# Altium PCB mdm3.PcbDoc (part 1 of 3)
Units mil, origin at the board's own origin, x right, y up, seen from the top; angles counter-clockwise.
Board outline 3925 x 3925 mil, 2 copper layers (TopLayer, BottomLayer); 80 components, 90 nets, 713 pads, 10 vias.
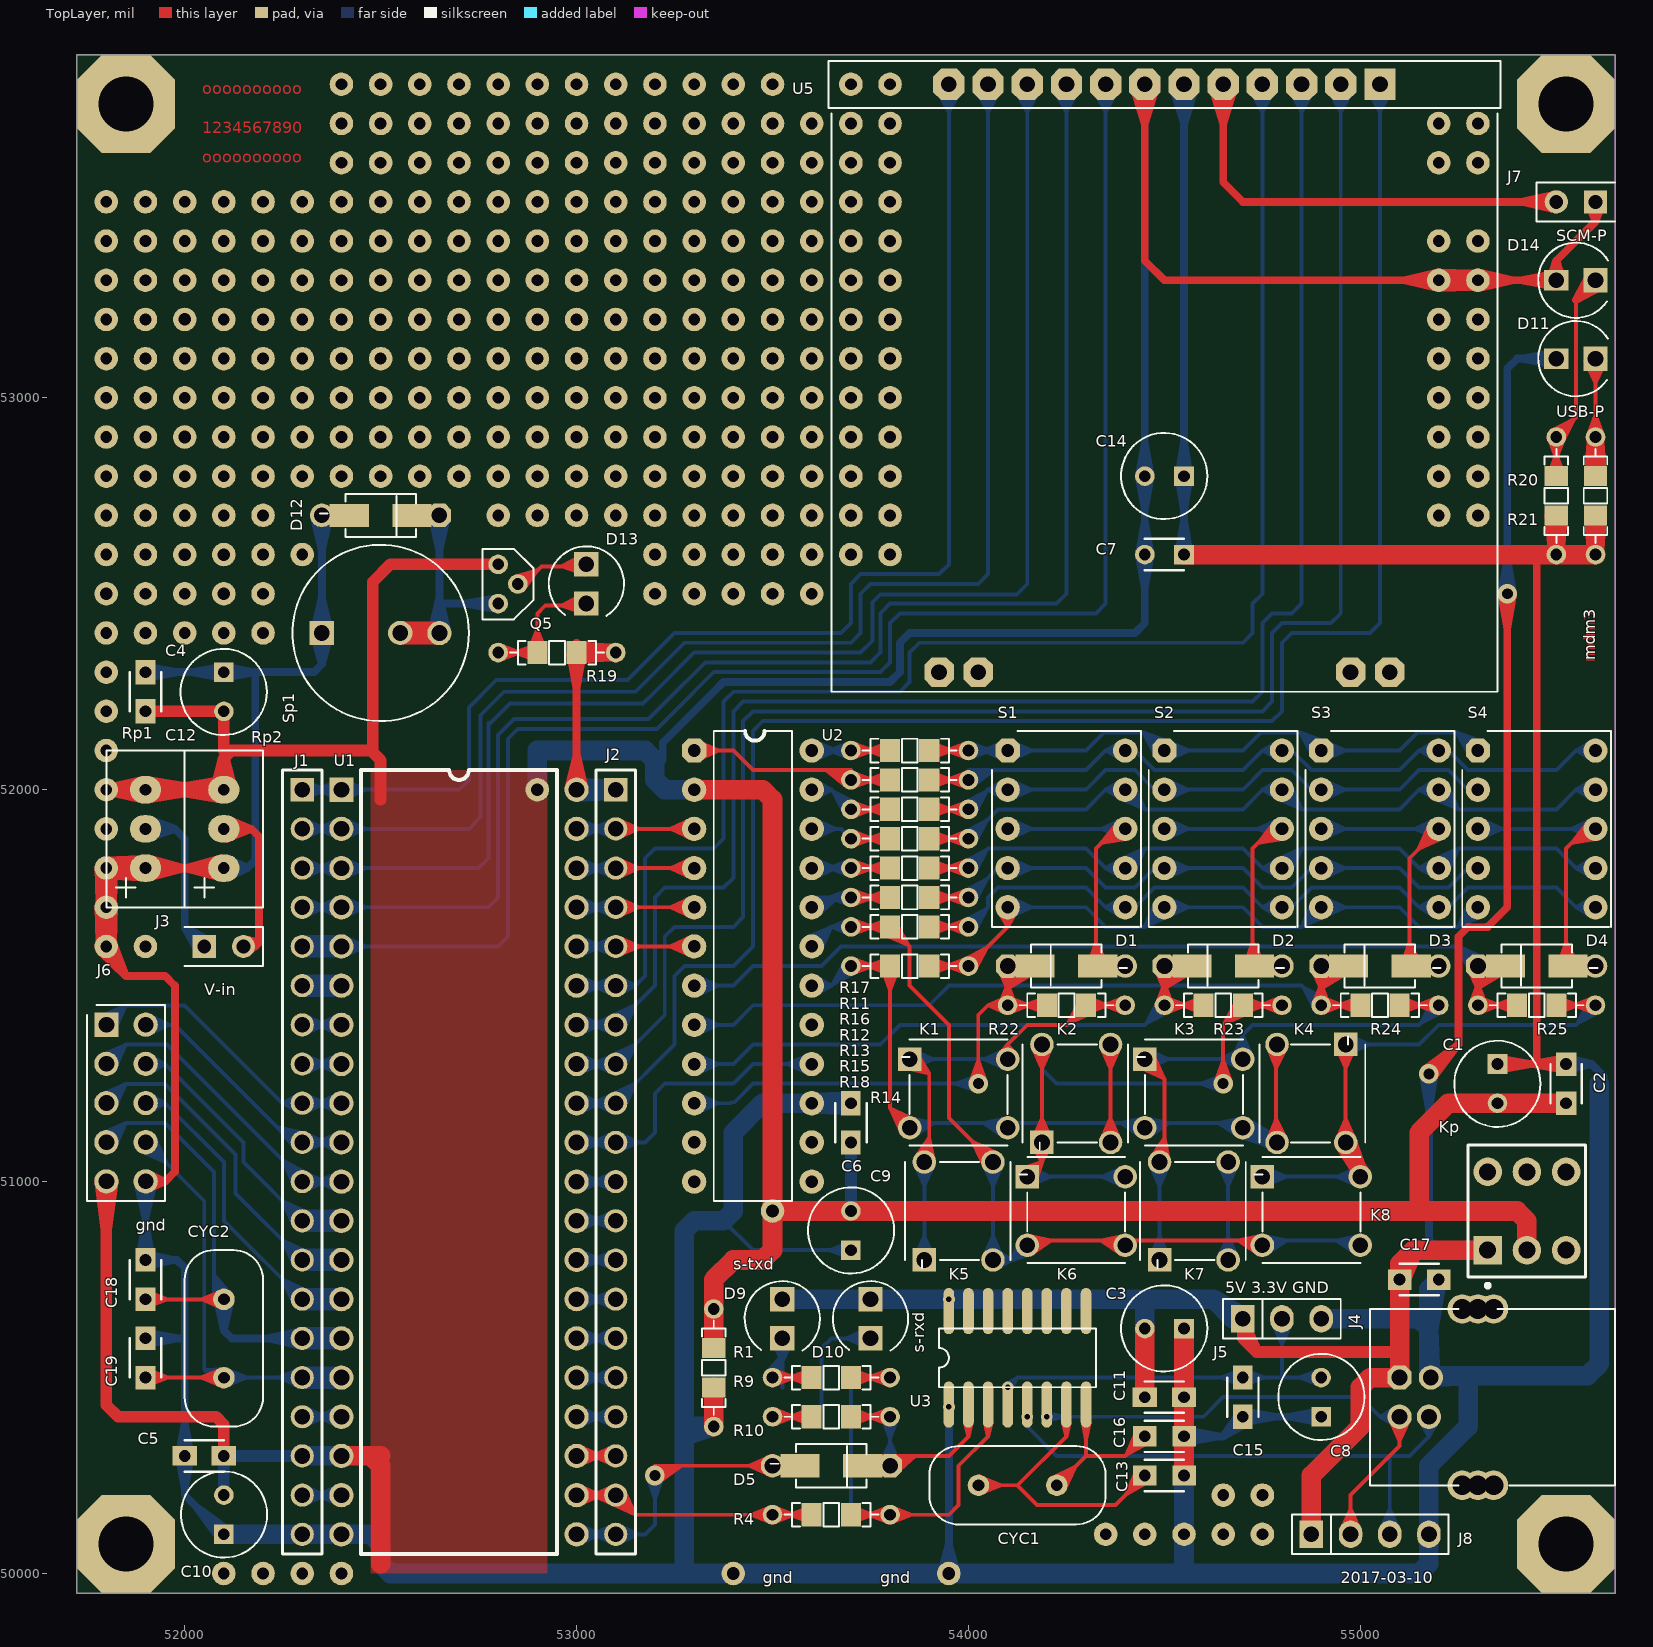
[diagram p0: TopLayer view]
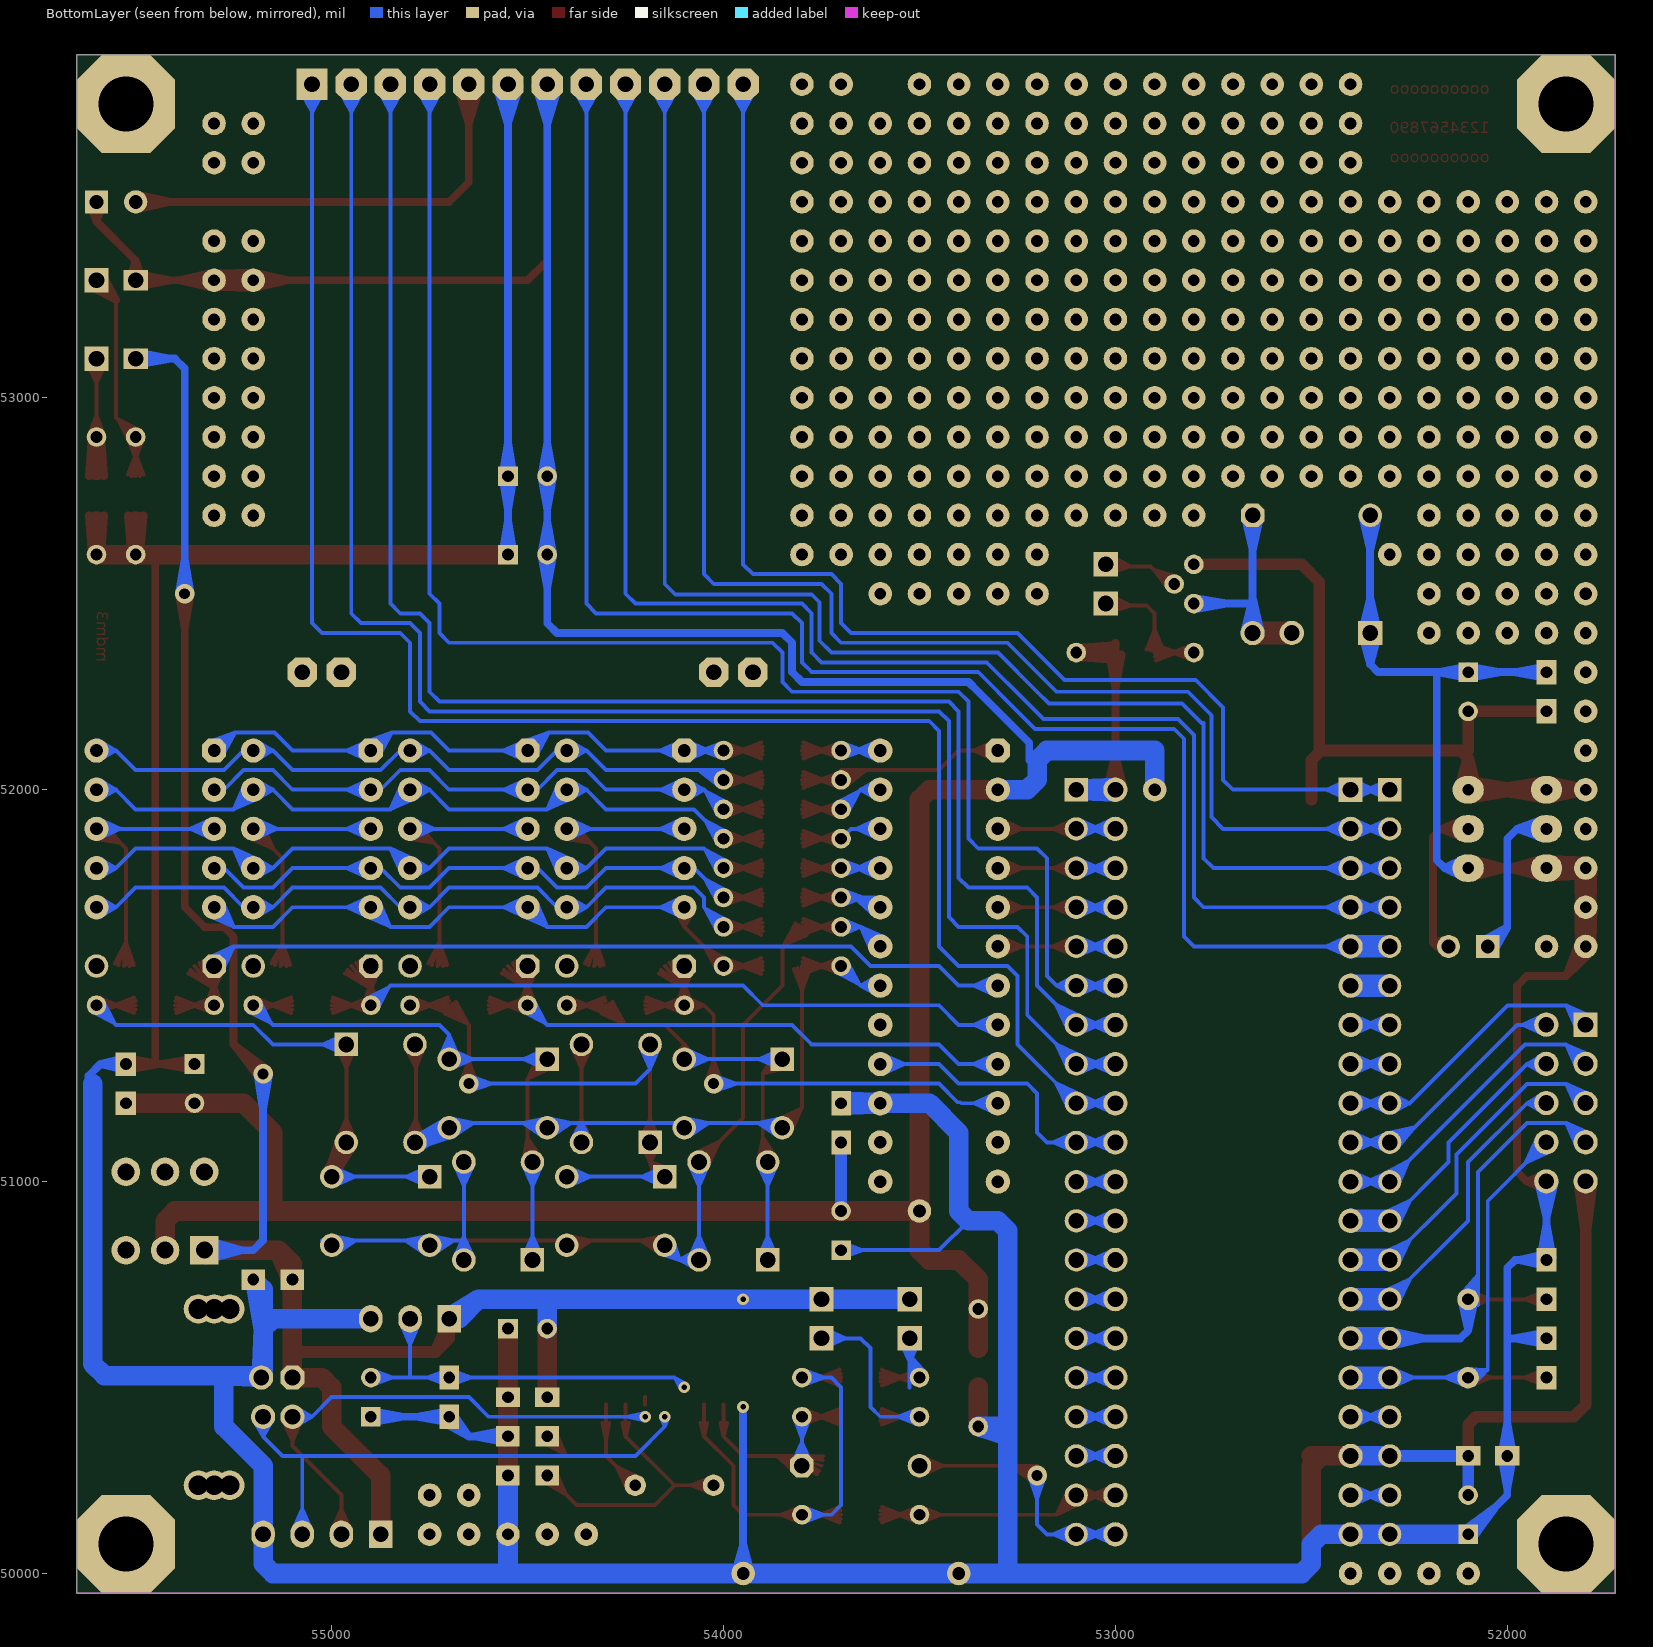
[diagram p1: BottomLayer view, seen from below]

## Layer stack, top to bottom
TopLayer: signal copper 1.4
Dielectric: core 12.6, FR-4, Dk 4.8
BottomLayer: signal copper 1.4

## Board outline
51725,53875 51725,49950 55650,49950 55650,53875

## Design rules (kind name [scope] priority, off if disabled: settings)
AssemblyTestPointUsage [All] p1 off:
AssemblyTestpoint [All] p1 off: testpointundercomponent=TRUE minsize=40 maxsize=100 preferedsize=60 minholesize=0 maxholesize=40 preferedholesize=32 testpointgrid=1 usegrid=TRUE gridtolerance=0.01 allowsidetop=TRUE allowsidebottom=TRUE
Clearance [All] p1: gap=10
ComponentClearance [All] p1 off: gap=10 collisioncheckmode=3 verticalgap=10 showdistances=FALSE
DiffPairsRouting [All] p1 off: maxlimit=10 minlimit=10 mostfreqgap=10 maxuncoupledlength=500
FabricationTestPointUsage TestPointUsage [All] p1 off: valid=0 allowmultiple=FALSE
FabricationTestpoint Testpoint [All] p1 off: side=3 testpointundercomponent=TRUE minsize=40 maxsize=100 preferedsize=60 minholesize=20 maxholesize=40 preferedholesize=32 testpointgrid=1 allowsidetop=TRUE allowsidebottom=TRUE usegrid=TRUE gridtolerance=0.01
FanoutControl Fanout_BGA [IsBGA] p1 off: bgadir=Out bgaviamode=Centered fanoutstyle=Auto fanoutdirection=Alternating viagrid=1 // Fanout_BGA (Default Rule)
FanoutControl Fanout_LCC [IsLCC] p2 off: bgadir=Out bgaviamode=Centered fanoutstyle=Auto fanoutdirection=Alternating viagrid=1 // Fanout_LCC (Default Rule)
FanoutControl Fanout_SOIC [IsSOIC] p3 off: bgadir=Out bgaviamode=Centered fanoutstyle=Auto fanoutdirection=Alternating viagrid=1 // Fanout_SOIC (Default Rule)
FanoutControl Fanout_Small [(CompPinCount < 5)] p4 off: bgadir=Out bgaviamode=Centered fanoutstyle=Auto fanoutdirection=OutThenIn viagrid=1 // Fanout_Small (Default Rule)
FanoutControl Fanout_Default [All] p5 off: bgadir=Out bgaviamode=Centered fanoutstyle=Auto fanoutdirection=Alternating viagrid=1 // Fanout_Default (Default Rule)
Height [All] p1 off: minheight=0 maxheight=1000 prefheight=500
HoleToHoleClearance [All] p1 off: gap=10 allowstackedmicrovias=TRUE
LayerPairs [All] p1 off: enforce=TRUE
MinimumSolderMaskSliver [All] p1 off: minsoldermaskwidth=10
NetAntennae [All] p1 off: netantennaetolerance=0
PasteMaskExpansion [All] p1 off: expansion=0
PlaneClearance [All] p1 off: clearance=20
PlaneConnect [All] p1 off: planeconnectstyle=Relief reliefexpansion=20 reliefentries=4 reliefconductorwidth=10 reliefairgap=10
PolygonConnect [All] p1 off: connectstyle=Relief reliefconductorwidth=10 reliefentries=4 polygonreliefangle="90 Angle"
RoutingPriority [All] p1 off: routingpriority=0
RoutingVias [All] p1: holewidth=28 width=50 viastyle="Through Hole" minholewidth=28 minwidth=50 maxholewidth=28 maxwidth=50
SilkToSilkClearance [All] p1 off: silktosilkclearance=10
SilkscreenOverComponentPads [All] p1 off: minsilkscreentomaskgap=10
SolderMaskExpansion [All] p1 off: expansion=4
Width [All] p1: maxlimit=100 minlimit=10 preferedwidth=30 toplayer_prefwidth=10
Width Width_1 [All] p2 off: maxlimit=100 minlimit=10 preferedwidth=50
Width Width_2 [All] p3 off: maxlimit=100 minlimit=10 preferedwidth=30
6 further rules are at their usual default settings.

## Components (designator, comment, footprint, x,y, rotation, side; value= is the part's Value field where it differs from the comment)
C1 "10u/16v" rb.1/.2 55350,51250 r90 top
C2 "104" cap0.1#1 55525,51200 r90 top
C3 "10u/16v" rb.1/.2 54500,50625 r0 top
C4 "104" cap0.1#2 51900,52200 r90 top
C5 "104" cap0.1#2 52100,50300 r180 top
C6 "104" cap0.1#2 53700,51100 r90 top
C7 "104" cap0.1#3 54450,52600 r0 top
C8 "10u/16v" rb.1/.2 54900,50450 r270 top
C9 "100u/16v" rb.1/.2 53700,50875 r270 top
C10 "10u/16v" rb.1/.2 52100,50150 r270 top
C11 "104" cap0.1#2 54450,50450 r0 top
C12 "10u/16v" rb.1/.2 52100,52250 r90 top
C13 "104" cap010805 54450,50250 r0 top
C14 "10u/16v" rb.1/.2 54500,52800 r0 top
C15 "104" cap0.1#2 54700,50500 r270 top
C16 "" cap010805 54450,50350 r0 top
C17 "104" cap0.1#1 55100,50750 r0 top
C18 "" cap010805 51900,50700 r90 top
C19 "" cap010805 51900,50500 r90 top
CYC1 "12Mhz" cyc-rad 54225,50225.07 r180 top
CYC2 "22.1184Mhz" cyc-rad 52100,50500 r90 top
D1 "4007" smc03 54100,51550 r0 top
D2 "4007" smc03 54500,51550 r0 top
D3 "4007" smc03 54900,51550 r0 top
D4 "4007" smc03 55300,51550 r0 top
D5 "sma03" smc03 53800,50275 r180 top
D9 "LED" led-3#1 53525,50650 r270 top
D10 "LED" led-3#1 53750,50650 r270 top
D11 "LED" led-3#2 55550,53100 r0 top
D12 "4007" smc03 52650,52700 r180 top
D13 "LED" led-3#1 53025,52525 r270 top
D14 "LED" led-3#2 55550,53300 r0 top
J1 "Header 20" HDR1X20 52300,52000 r270 top
J2 "Header 20" HDR1X20 53100,52000 r270 top
J3 "Header 2" HDR1X2 52050,51600 r0 top
J4 "" USB_b 55100,50500 r90 top
J5 "CON3" SIP3 54800,50650 r0 top
J6 "CON10" idc10 51800,51400 r270 top
J7 "Header 2" HDR1X2 55600,53500 r180 top
J8 "CON4" SIP4 54975,50100 r0 top
K1 "6-6-5" pb6_6 53975,51225 r0 top
K2 "6-6-5" pb6_6 54275,51225 r90 top
K3 "6-6-5" pb6_6 54575,51225 r0 top
K4 "6-6-5" pb6_6 54875,51225 r270 top
K5 "6-6-5" pb6_6 53975,50925 r90 top
K6 "6-6-5" pb6_6 54275,50925 r0 top
K7 "6-6-5" pb6_6 54575,50925 r90 top
K8 "6-6-5" pb6_6 54875,50925 r0 top
Kp "SW-DPDT" DPDT-6 55425,50925 r90 top
Q5 "8550" to-92a 52800,52575 r270 top
R1 "Res2" a030805 53350,50675 r270 top
R4 "Res2" a030805 53800,50150 r180 top
R9 "Res2" a030805 53500,50500 r0 top
R10 "Res2" a030805 53800,50400 r180 top
R11 "Res2" a030805 53700,52025 r0 top
R12 "Res2" a030805 53700,51875 r0 top
R13 "Res2" a030805 53700,51800 r0 top
R14 "Res2" a030805 53700,51550 r0 top
R15 "Res2" a030805 53700,51725 r0 top
R16 "Res2" a030805 53700,51950 r0 top
R17 "Res2" a030805 53700,52100 r0 top
R18 "Res2" a030805 53700,51650 r0 top
R19 "Res2" a030805 52800,52350 r0 top
R20 "Res2" a030805 55500,52600 r90 top
R21 "Res2" a030805 55600,52600 r90 top
R22 "Res2" a030805 54100,51450 r0 top
R23 "Res2" a030805 54500,51450 r0 top
R24 "Res2" a030805 54900,51450 r0 top
R25 "Res2" a030805 55300,51450 r0 top
Rp1 "10k" VR3296-1 51900,51900 r270 top
Rp2 "10k" VR3296-1 52100,51900 r270 top (schematic designator Rp1)
S1 "3911AH" LED10s 54100,52100 r0 top
S2 "3911AH" LED10s 54500,52100 r0 top
S3 "3911AH" LED10s 54900,52100 r0 top
S4 "3911AH" LED10s 55300,52100 r0 top
Sp1 "SPEAKER" sp0.23 52350,52400 r0 top
U1 "IAP15F2K61S2" DIP40 52400,52000 r0 top
U2 "CH451" dip24 53300,52100 r0 top
U3 "CH340G" SOP-16 53925,50550 r0 top
U5 "lcd" jlx12864-1 55050,53800 r0 top locked

## Footprints (in the part's own frame and the unit in brackets; to place one, negate y for a bottom-side part, rotate by r counter-clockwise, add the part's x,y. Pads: shape width x height; smd on the part's side, far side on the other; paste and mask are expansions set on the pad)
a030805 [mm]
  round 1.27 hole 0.762: 1(0,0) 2(7.62,0)
  rect 1.3x1.5 smd: 3(2.54,0) 4(5.08,0)
  silkscreen extent 0.76,-0.76 6.86,0.76
cap0.1#1 [mil]
  rect 60x52 hole 30: 1(0,0) 2(100,0)
  silkscreen extent 0,-40 100,40
cap0.1#2 [mil]
  rect 62x50 hole 30: 1(0,0) 2(100,0)
  silkscreen extent 0,-40 100,40
cap0.1#3 [mil]
  round 50 hole 30: 1(0,0)
  rect 50x50 hole 30: 2(100,0)
  silkscreen extent 0,-40 100,40
cap010805 [mil] "0.1&0805"
  rect 60x52 hole 30: 1(0,0) 2(100,0)
  silkscreen extent 0,-40 100,40
cyc-rad [mil]
  round 55 hole 30: 1(-0.45,-0.07) 2(199.55,-0.07)
  silkscreen extent -125,-100 325,100
dip24 [mil]
  oct 62x62 hole 32: 1(0,0)
  round 62 hole 32: 2(0,-100) 3(0,-200) 4(0,-300) 5(0,-400) 6(0,-500) 7(0,-600) 8(0,-700) 9(0,-800) 10(0,-900) 11(0,-1000) 12(0,-1100) 13(300,-1100) 14(300,-1000) 15(300,-900) 16(300,-800) 17(300,-700) 18(300,-600) 19(300,-500) 20(300,-400) 21(300,-300) 22(300,-200) 23(300,-100) 24(300,0)
  silkscreen extent 50,-1150 250,50
DIP40 [mil]
  rect 62x62 hole 40: 1(0,0)
  round 62 hole 40: 2(0,-100) 3(0,-200) 4(0,-300) 5(0,-400) 6(0,-500) 7(0,-600) 8(0,-700) 9(0,-800) 10(0,-900) 11(0,-1000) 12(0,-1100) 13(0,-1200) 14(0,-1300) 15(0,-1400) 16(0,-1500) 17(0,-1600) 18(0,-1700) 19(0,-1800) 20(0,-1900) 21(600,-1900) 22(600,-1800) 23(600,-1700) 24(600,-1600) 25(600,-1500) 26(600,-1400) 27(600,-1300) 28(600,-1200) 29(600,-1100) 30(600,-1000) 31(600,-900) 32(600,-800) 33(600,-700) 34(600,-600) 35(600,-500) 36(600,-400) 37(600,-300) 38(600,-200) 39(600,-100) 40(600,0)
  silkscreen extent 50,-1950 550,50
DPDT-6 [mm] "Double-Pole, Double-Throw Switch; 6 Leads"
  rect 1.85x1.85 hole 1.1: 1(-2.54,2.54)
  round 1.85 hole 1.1: 2(-2.54,0) 3(-2.54,-2.54) 4(2.54,-2.54) 5(2.54,0) 6(2.54,2.54)
  silkscreen extent -4.96,-3.81 4.28,3.81
HDR1X2 [mm] "Connector; Header; 2 Position"
  rect 1.5x1.5 hole 0.9: 1(0,0)
  round 1.5 hole 0.9: 2(2.54,0)
  silkscreen extent -1.27,-1.27 3.81,1.27
HDR1X20 [mm] "Connector; Header; 20 Position"
  rect 1.5x1.5 hole 1.016: 1(0,0)
  round 1.5 hole 1.016: 2(2.54,0) 3(5.08,0) 4(7.62,0) 5(10.16,0) 6(12.7,0) 7(15.24,0) 8(17.78,0) 9(20.32,0) 10(22.86,0) 11(25.4,0) 12(27.94,0) 13(30.48,0) 14(33.02,0) 15(35.56,0) 16(38.1,0) 17(40.64,0) 18(43.18,0) 19(45.72,0) 20(48.26,0)
  silkscreen extent -1.27,-1.27 49.53,1.27
idc10 [mil]
  rect 62x62 hole 40: 1(-0.5,0.29)
  round 62 hole 40: 2(-0.5,100.29) 3(99.5,0.29) 4(99.5,100.29) 5(199.5,0.29) 6(199.5,100.29) 7(299.5,0.29) 8(299.5,100.29) 9(399.5,0.29) 10(399.5,100.29)
  silkscreen extent -51,-50 450,150
jlx12864-1 [mil]
  rect 80x80 hole 40: 1(0,0)
  oct 80x80 hole 40: 2(-100,0) 3(-200,0) 4(-300,0) 5(-400,0) 6(-500,0) 7(-600,0) 8(-700,0) 9(-800,0) 10(-900,0) 11(-1000,0) 12(-1100,0)
  silkscreen extent -1407,-60 308,60
LED10s [mil]
  oct 62x62 hole 32: 1(0,0)
  round 62 hole 32: 2(0,-100) 3(0,-200) 4(0,-300) 5(0,-400) 6(300,-400) 7(300,-300) 8(300,-200) 9(300,-100) 10(300,0)
  silkscreen extent -40,-450 340,50
led-3#1 [mil]
  rect 62x62 hole 40: 1(-50,0) 2(50,0)
  silkscreen extent -96,-96 81,96
led-3#2 [mil]
  rect 62x52 hole 40: 1(-50,0)
  rect 62x62 hole 40: 2(50,0)
  silkscreen extent -96,-96 81,96
pb6_6 [mil] "button"
  rect 60x60 hole 40: 1(-125,87.5)
  round 60 hole 40: 2(-125,-87.5) 3(125,-87.5) 4(125,87.5)
  silkscreen extent -145,-132 125,138
rb.1/.2 [mil]
  rect 50x50 hole 30: 1(50,0)
  round 50 hole 30: 2(-50,0)
  silkscreen extent -110,-110 109,110
SIP3 [mil]
  rect 60x70 hole 40: 1(-100,0)
  oval 60x70 hole 40: 2(0,0) 3(100,0)
  silkscreen extent -150,-50 150,50
SIP4 [mil]
  rect 60x70 hole 40: 1(-100,0)
  oval 60x70 hole 40: 2(0,0) 3(100,0) 4(200,0)
  silkscreen extent -150,-50 250,50
smc03 [mil]
  oct 60x60 hole 40: 1(0,0)
  round 60 hole 40: 2(300,0)
  rect 100x59.06 smd: 3(70,0) 4(230,0)
  silkscreen extent 60,-55 305,55
SOP-16 [mil] "Small Outline; 16 Leads; Body Width 5.6 mm; Pitch 1.27 mm"
  oval 27x118 smd: 1(25,-119) 2(75,-119) 3(125,-119) 4(175,-119) 5(225,-119) 6(275,-119) 7(325,-119) 8(375,-119) 9(375,119.5) 10(325,119.5) 11(275,119.5) 12(225,119.5) 13(175,119.5) 14(125,119.5) 15(75,119.5) 16(25,119.5)
  silkscreen extent 0,-75 400,75
sp0.23 [mil] "speak sip2-sip3"
  rect 62x62 hole 40: 1(0.09,-0.33)
  round 62 hole 40: 2(200,0) 3(300.09,-0.33)
  silkscreen extent -75,-225 375,225
to-92a [mil]
  round 50 hole 30: 1(0,0) 2(50,50) 3(100,0)
  silkscreen extent -39,-40 141,90
USB_b [mil]
  oct 62x62 hole 40: 1(0,0)
  round 62 hole 40: 2(-100,0) 3(-100,-75) 4(0,-80)
  round 75 hole 50: 5(-275,-240) 5(-275,-200) 5(-275,-160) 6(175,-200) 6(175,-160) 6(175,-240)
  silkscreen extent -275,-550 175,75
VR3296-1 [mil]
  oval 70x80 hole 30: 1(-100,0) 2(0,0) 3(100,0)
  silkscreen extent -200,-100 200,100

## Part data
C1 C3 C8 C9 C10 C12 C14: library part ELECTRO1, "Electrolytic Capacitor"
C2 C4 C5 C6 C7 C11 C15 C17: library part CAP, "Capacitor"
C13 C16 C18 C19: library part CAP
CYC1 CYC2: library part CRYSTAL, "Crystal"
D1 D2 D3 D4 D12: library part DIODE, "Diode"
J1 J2: "Header, 20-Pin"
J3 J7: "Header, 2-Pin"
J4: library part CON4, "Connector"
J5 J6 J8: "Connector"
K1 K2 K3 K4 K5 K6 K7 K8: library part SW-PB2
Kp: "Double-Pole, Double-Throw Switch"
Q5: library part PNP
R1 R4: library part Res22, "Resistor"
R9 R10 R11 R12 R13 R14 R15 R16 R17 R18 R19 R20 R21 R22 R23 R24 R25: "Resistor"
Rp1 Rp2: library part POT2
S1 S2 S3 S4: library part DS1
Sp1: "SPEAKER sip0.2/0.3"
U1: library part Component_3
U5: library part "12 HEADER"

## Free pads (board coordinates)
  round 60 hole 30: 0(51800,51600) 0(51800,52000) 0(54550,50100) 1(51800,51700) 1(52200,52400) 1(54450,50100) 2(51800,51800) 2(52000,52700) 2(52000,52800) 2(52000,53000) 2(52000,53100) 2(52100,52400) 2(53300,52500) 2(54350,50100) 3(52000,52400) 3(53300,52600) 3(54650,50100) 4(52300,52600) 4(53400,52600) 4(54750,50100) 5(51800,52100) 5(51800,52400) 5(52100,50000) 5(53400,52500) 5(54750,50200) 6(51900,51600) 6(51900,52400) 6(52200,50000) 6(52200,52500) 6(53500,52500) 6(54650,50200) 7(51800,52300) 7(52300,50000) 7(53500,52600) 8(51800,52200) 8(52400,50000) 8(53600,52600) 9(52800,52700) 9(53600,52500) 10(52900,52700) 10(53700,52600) 11(53000,52700) 11(53800,52600) 12(52200,52700) 12(53100,52700) 13(52100,52700) 13(53100,52800) 14(53200,52800) 15(53200,52700) 16(53200,52600) 17(53200,52500) 18(51800,51900) 18(51800,53200) 18(51800,53300) 18(51800,53400) 18(51800,53500) 19(51900,53200) 19(51900,53300) 19(51900,53400) 19(51900,53500) 19(52500,53800) 19(53300,52700) 20(52000,53300) 20(52000,53400) 20(52000,53500) 20(52100,52800) 20(52100,52900) 20(52100,53000) 20(52100,53100) 20(52100,53200) 20(52100,53300) 20(52500,53700) 20(52600,53800) 20(53400,52700) 20(55200,52700) 21(52100,53400) 21(52100,53500) 21(52200,52800) 21(52200,52900) 21(52200,53000) 21(52200,53100) 21(52200,53200) 21(52200,53300) 21(52500,53600) 21(52600,53600) 21(53500,52700) 21(53700,52700) 21(55300,52700) 22(52200,53400) 22(52200,53500) 22(52300,52800) 22(52300,52900) 22(52300,53000) 22(52300,53100) 22(52300,53200) 22(52300,53300) 22(52400,53600) 22(52600,53700) 22(53600,52700) 22(53800,52700) 23(52300,53400) 23(52300,53500) 23(52400,52800) 23(52400,52900) 23(52400,53000) 23(52400,53100) 23(52400,53200) 23(52400,53300) 23(52400,53700) 23(53700,53800) 24(52400,53400) 24(52400,53500) 24(52400,53800) 24(52500,52800) 24(52500,52900) 24(52500,53000) 24(52500,53100) 24(52500,53200) 24(52500,53300) 24(53800,53800) 25(52500,53400) 25(52500,53500) 25(52600,52800) 25(52600,52900) 25(52600,53000) 25(52600,53100) 25(52600,53200) 25(52600,53300) 26(52600,53400) 26(52600,53500) 26(52700,52800) 26(52700,52900) 26(52700,53000) 26(52700,53100) 26(52700,53200) 26(52700,53300) 26(52700,53700) 26(52700,53800) 27(52700,53400) 27(52700,53500) 27(52700,53600) 27(52800,52800) 27(52800,52900) 27(52800,53000) 27(52800,53100) 27(52800,53200) 27(52800,53300) 27(52800,53700) 27(52800,53800) 28(52800,53400) 28(52800,53500) 28(52800,53600) 28(52900,52800) 28(52900,52900) 28(52900,53000) 28(52900,53100) 28(52900,53200) 28(52900,53300) 28(52900,53700) 28(52900,53800) 29(52900,53400) 29(52900,53500) 29(52900,53600) 29(53000,52800) 29(53000,52900) 29(53000,53000) 29(53000,53100) 29(53000,53200) 29(53000,53300) 29(53000,53700) 29(53000,53800) 30(53000,53400) 30(53000,53500) 30(53000,53600) 30(53100,52900) 30(53100,53000) 30(53100,53100) 30(53100,53200) 30(53100,53300) 30(53100,53700) 30(53100,53800) 31(53100,53400) 31(53100,53500) 31(53100,53600) 31(53200,52900) 31(53200,53000) 31(53200,53100) 31(53200,53200) 31(53200,53300) 31(53200,53700) 31(53200,53800) 32(53200,53400) 32(53200,53500) 32(53200,53600) 32(53300,52800) 32(53300,52900) 32(53300,53000) 32(53300,53100) 32(53300,53200) 32(53300,53300) 32(53300,53700) 32(53300,53800) 33(53300,53400) 33(53300,53500) 33(53300,53600) 33(53400,52800) 33(53400,52900) 33(53400,53000) 33(53400,53100) 33(53400,53200) 33(53400,53300) 33(53400,53700) 33(53400,53800) 33(55200,52800) 33(55200,52900) 33(55200,53000) 33(55200,53100) 33(55200,53200) 33(55200,53300) 33(55200,53700) 34(53400,53400) 34(53400,53500) 34(53400,53600) 34(53500,52800) 34(53500,52900) 34(53500,53000) 34(53500,53100) 34(53500,53200) 34(53500,53300) 34(53500,53700) 34(53500,53800) 34(53700,52800) 34(53700,52900) 34(53700,53000) 34(53700,53100) 34(53700,53200) 34(53700,53300) 34(53700,53700) 34(55200,53400) 34(55200,53600) 34(55300,52800) 34(55300,52900) 34(55300,53000) 34(55300,53100) 34(55300,53200) 34(55300,53300) 34(55300,53700) 35(53500,53400) 35(53500,53500) 35(53500,53600) 35(53600,52800) 35(53600,52900) 35(53600,53000) 35(53600,53100) 35(53600,53200) 35(53600,53300) 35(53600,53400) 35(53600,53500) 35(53600,53600) 35(53600,53700) 35(53700,53400) 35(53700,53500) 35(53700,53600) 35(53800,52800) 35(53800,52900) 35(53800,53000) 35(53800,53100) 35(53800,53200) 35(53800,53300) 35(53800,53400) 35(53800,53500) 35(53800,53600) 35(53800,53700) 35(55300,53400) 35(55300,53600) 36(51900,52500) 38(51800,52700) 38(51800,53000) 39(51800,52800) 39(51800,53100) 39(52000,52500) 40(51900,52800) 40(51900,53100) 41(51900,52700) 41(51900,53000) 42(51900,52600) 42(51900,52900) 43(51800,52600) 43(51800,52900) 44(52200,52600)
  round 60 hole 32: 0(52000,52600) 0(52000,52900) 0(52900,52000) 0(53400,50000) 1(53950,50000) 13(52000,53200) 27(51800,52500) 30(52100,52600) 31(52100,52500) 32(53500,50925)
  oct 75x75 hole 40: 0(54975,52300) 1(55075,52300) 4(54025,52300) 5(53925,52300)
  oct 250x250 hole 140: 1(51850,53750) 2(51850,50075) 3(55525,50075) 4(55525,53750)

## Via types
v1: diameter 30, hole 14, TopLayer to BottomLayer, 5 vias
v2: diameter 50, hole 28, TopLayer to BottomLayer, 5 vias

## Nets (pads, with @x,y where several pads share a name; then routed paths per layer and width w, separated by ;. In a path a pad name is that pad's centre, name@x,y a point inside that pad or via, vN(x,y) a via of type N, cw(c..) or ccw(c..) an arc to the next point about the centre after c; other vN are vias at no path point)
A: R11.2 R11.4 S1.10 S2.10 S3.10 S4.10 | length 4451.2
  TopLayer w10: R11.4@53900,52025 R11.2@54000,52025 ; R11.4@53901.01,52014.46 53955.59,52025 ; R11.4@53901.01,52035.54 53955.59,52025 ; R11.4@53903.81,52004.77 53955.59,52025 ; R11.4@53903.81,52045.23 53955.59,52025 ; R11.2@53996.36,52005.33 53945,52025 ; R11.2@53996.36,52044.67 53945,52025 ; R11.2@53999.09,52015.04 53945,52025 ; R11.2@53999.09,52034.96 53945,52025
  BottomLayer w10: R11.2@53995.51,52044.49 54063.91,52050 ; R11.2@53997.05,52034.55 54063.91,52050 ; R11.2@54000,52025 54063.91,52050 ; 54000,52050 54300,52050 54350,52100 ; R11.2@54004.31,52015.98 54063.91,52050 ; R11.2@54009.92,52007.63 54063.91,52050 ; S1.10@54393.24,52074.89 54350,52100 ; S1.10@54393.24,52125.11 54350,52100 ; S1.10@54397.44,52084.21 54350,52100 ; S1.10@54397.44,52115.79 54350,52100 ; S1.10@54399.64,52094.01 54350,52100 ; S1.10@54399.64,52105.99 54350,52100 ; S2.10@54793.24,52074.89 54750,52100 ; S2.10@54793.24,52125.11 54750,52100 ; S2.10@54797.44,52084.21 54750,52100 ; S2.10@54797.44,52115.79 54750,52100 ; S2.10@54799.64,52094.01 54750,52100 ; S2.10@54799.64,52105.99 54750,52100 ; S4.10@55593.24,52074.89 55550,52100 ; S4.10@55593.24,52125.11 55550,52100 ; S4.10@55597.44,52084.21 55550,52100 ; S4.10@55597.44,52115.79 55550,52100 ; S4.10@55599.64,52094.01 55550,52100 ; S4.10@55599.64,52105.99 55550,52100 ; S4.10@55600,52100 55550,52100 ; 54350,52100 S1.10@54400,52100 ; 54350,52100 S1.10@54400,52100 ; S1.10@54400,52100 54425,52100 54475,52050 54700,52050 54750,52100 ; 54750,52100 S2.10@54800,52100 ; 54750,52100 S2.10@54800,52100 ; S2.10@54800,52100 54825,52100 54875,52050 55100,52050 ; 55100,52050 55150,52100 ; 55100,52050 55150,52100 ; 55150,52100 S3.10@55200,52100 ; 55150,52100 55199.64,52105.99 55150,52100 ; 55150,52100 55199.64,52094.01 55150,52100 ; 55150,52100 55197.44,52115.79 55150,52100 ; 55150,52100 55197.44,52084.21 55150,52100 ; 55150,52100 55193.24,52125.11 55150,52100 ; 55150,52100 55193.24,52074.89 55150,52100 ; 55150,52100 S3.10@55200,52100 ; 55150,52100 S3.10@55200,52100 ; 55150,52100 S3.10@55200,52100 ; S3.10@55200,52100 55225,52100 55275,52050 55500,52050 55550,52100
B: R12.2 R12.4 S1.9 S2.9 S3.9 S4.9 | length 5673.3
  TopLayer w10: R12.4@53900,51875 R12.2@54000,51875 ; R12.4@53901.01,51864.46 53955.59,51875 ; R12.4@53901.01,51885.54 53955.59,51875 ; R12.4@53903.81,51854.77 53955.59,51875 ; R12.4@53903.81,51895.23 53955.59,51875 ; R12.2@53996.36,51855.33 53945,51875 ; R12.2@53996.36,51894.67 53945,51875 ; R12.2@53999.09,51865.04 53945,51875 ; R12.2@53999.09,51884.96 53945,51875
  BottomLayer w10: R12.2@53988.19,51891.14 54046.21,51921.21 ; R12.2@53993.49,51882.59 54046.21,51921.21 ; R12.2@54000,51875 54075,51950 54300,51950 54350,52000 ; R12.2@54007.59,51868.49 54046.21,51921.21 ; R12.2@54016.14,51863.19 54046.21,51921.21 ; S1.9@54385.31,51978.55 54450,51950 ; S1.9@54390.04,51987.48 54450,51950 ; S1.9@54393.24,51974.89 54350,52000 ; S1.9@54393.24,52025.11 54350,52000 ; S1.9@54395.94,51995.58 54450,51950 ; S1.9@54397.44,51984.21 54350,52000 ; S1.9@54397.44,52015.79 54350,52000 ; S1.9@54399.64,51994.01 54350,52000 ; S1.9@54399.64,52005.99 54350,52000 ; S1.9@54404.42,52004.06 54450,51950 ; S1.9@54412.52,52009.96 54450,51950 ; S1.9@54421.45,52014.69 54450,51950 ; S2.9@54785.31,51978.55 54850,51950 ; S2.9@54790.04,51987.48 54850,51950 ; S2.9@54793.24,51974.89 54750,52000 ; S2.9@54793.24,52025.11 54750,52000 ; S2.9@54795.94,51995.58 54850,51950 ; S2.9@54797.44,51984.21 54750,52000 ; S2.9@54797.44,52015.79 54750,52000 ; S2.9@54799.64,51994.01 54750,52000 ; S2.9@54799.64,52005.99 54750,52000 ; S2.9@54804.42,52004.06 54850,51950 ; S2.9@54812.52,52009.96 54850,51950 ; S2.9@54821.45,52014.69 54850,51950 ; S3.9@55185.31,51978.55 55250,51950 ; S3.9@55190.04,51987.48 55250,51950 ; S3.9@55195.94,51995.58 55250,51950 ; S3.9@55204.42,52004.06 55250,51950 ; S3.9@55212.52,52009.96 55250,51950 ; S3.9@55221.45,52014.69 55250,51950 ; S4.9@55593.24,51974.89 55550,52000 ; S4.9@55593.24,52025.11 55550,52000 ; S4.9@55597.44,51984.21 55550,52000 ; S4.9@55597.44,52015.79 55550,52000 ; S4.9@55599.64,51994.01 55550,52000 ; S4.9@55599.64,52005.99 55550,52000 ; S4.9@55600,52000 55550,52000 ; 54350,52000 S1.9@54400,52000 ; 54350,52000 S1.9@54400,52000 ; S1.9@54400,52000 54450,51950 ; 54450,51950 54700,51950 54750,52000 ; 54750,52000 S2.9@54800,52000 ; 54750,52000 S2.9@54800,52000 ; S2.9@54800,52000 54850,51950 ; 54850,51950 55100,51950 ; 55100,51950 55150,52000 ; 55100,51950 55150,52000 ; 55150,52000 S3.9@55200,52000 ; 55150,52000 55199.64,52005.99 55150,52000 ; 55150,52000 55199.64,51994.01 55150,52000 ; 55150,52000 55197.44,52015.79 55150,52000 ; 55150,52000 55197.44,51984.21 55150,52000 ; 55150,52000 55193.24,52025.11 55150,52000 ; 55150,52000 55193.24,51974.89 55150,52000 ; 55150,52000 S3.9@55200,52000 ; 55150,52000 S3.9@55200,52000 ; 55150,52000 S3.9@55200,52000 ; S3.9@55200,52000 55250,51950 ; 55250,51950 55500,51950 55550,52000
C: R13.2 R13.4 S1.7 S2.7 S3.7 S4.7 | length 5663
  TopLayer w10: R13.4@53900,51800 R13.2@54000,51800 ; R13.4@53901.01,51789.46 53955.59,51800 ; R13.4@53901.01,51810.54 53955.59,51800 ; R13.4@53903.81,51779.77 53955.59,51800 ; R13.4@53903.81,51820.23 53955.59,51800 ; R13.2@53996.36,51780.33 53945,51800 ; R13.2@53996.36,51819.67 53945,51800 ; R13.2@53999.09,51790.04 53945,51800 ; R13.2@53999.09,51809.96 53945,51800
  BottomLayer w10: R13.2@53988.19,51816.14 54046.21,51846.21 ; R13.2@53993.49,51807.59 54046.21,51846.21 ; R13.2@54000,51800 54050,51850 54300,51850 54350,51800 ; R13.2@54007.59,51793.49 54046.21,51846.21 ; R13.2@54016.14,51788.19 54046.21,51846.21 ; S1.7@54385.31,51821.45 54450,51850 ; S1.7@54390.04,51812.52 54450,51850 ; S1.7@54393.24,51774.89 54350,51800 ; S1.7@54393.24,51825.11 54350,51800 ; S1.7@54395.94,51804.42 54450,51850 ; S1.7@54397.44,51784.21 54350,51800 ; S1.7@54397.44,51815.79 54350,51800 ; S1.7@54399.64,51794.01 54350,51800 ; S1.7@54399.64,51805.99 54350,51800 ; S1.7@54404.42,51795.94 54450,51850 ; S1.7@54412.52,51790.04 54450,51850 ; S1.7@54421.45,51785.31 54450,51850 ; S2.7@54785.31,51821.45 54850,51850 ; S2.7@54790.04,51812.52 54850,51850 ; S2.7@54793.24,51774.89 54750,51800 ; S2.7@54793.24,51825.11 54750,51800 ; S2.7@54795.94,51804.42 54850,51850 ; S2.7@54797.44,51784.21 54750,51800 ; S2.7@54797.44,51815.79 54750,51800 ; S2.7@54799.64,51794.01 54750,51800 ; S2.7@54799.64,51805.99 54750,51800 ; S2.7@54804.42,51795.94 54850,51850 ; S2.7@54812.52,51790.04 54850,51850 ; S2.7@54821.45,51785.31 54850,51850 ; S3.7@55185.31,51821.45 55250,51850 ; S3.7@55190.04,51812.52 55250,51850 ; S3.7@55195.94,51804.42 55250,51850 ; S3.7@55204.42,51795.94 55250,51850 ; S3.7@55212.52,51790.04 55250,51850 ; S3.7@55221.45,51785.31 55250,51850 ; S4.7@55593.24,51774.89 55550,51800 ; S4.7@55593.24,51825.11 55550,51800 ; S4.7@55597.44,51784.21 55550,51800 ; S4.7@55597.44,51815.79 55550,51800 ; S4.7@55599.64,51794.01 55550,51800 ; S4.7@55599.64,51805.99 55550,51800 ; S4.7@55600,51800 55550,51800 ; 54350,51800 S1.7@54400,51800 ; 54350,51800 S1.7@54400,51800 ; S1.7@54400,51800 54450,51850 ; 54450,51850 54700,51850 54750,51800 ; 54750,51800 S2.7@54800,51800 ; 54750,51800 S2.7@54800,51800 ; S2.7@54800,51800 54850,51850 ; 54850,51850 55100,51850 ; 55100,51850 55150,51800 ; 55100,51850 55150,51800 ; 55150,51800 S3.7@55200,51800 ; 55150,51800 55199.64,51805.99 55150,51800 ; 55150,51800 55199.64,51794.01 55150,51800 ; 55150,51800 55197.44,51815.79 55150,51800 ; 55150,51800 55197.44,51784.21 55150,51800 ; 55150,51800 55193.24,51825.11 55150,51800 ; 55150,51800 55193.24,51774.89 55150,51800 ; 55150,51800 S3.7@55200,51800 ; 55150,51800 S3.7@55200,51800 ; 55150,51800 S3.7@55200,51800 ; S3.7@55200,51800 55250,51850 ; 55250,51850 55500,51850 55550,51800
D: R14.2 R14.4 S1.5 S2.5 S3.5 S4.5 | length 5352.4
  TopLayer w10: R14.4@53901.01,51539.46 53955.59,51550 ; R14.4@53901.01,51560.54 53955.59,51550 ; R14.4@53901.87,51539.58 53930,51550 ; R14.4@53901.87,51560.42 53930,51550 ; R14.4@53903.81,51529.77 53955.59,51550 ; R14.4@53903.81,51570.23 53955.59,51550 ; R14.4@53907.07,51530.66 53930,51550 ; R14.4@53907.07,51569.34 53930,51550 ; R14.2@53988.19,51566.14 54046.21,51596.21 ; R14.2@53993.49,51557.59 54046.21,51596.21 ; R14.2@53996.36,51530.33 53945,51550 ; R14.2@53996.36,51569.67 53945,51550 ; R14.2@53999.09,51540.04 53945,51550 ; R14.2@53999.09,51559.96 53945,51550 ; R14.2@54007.59,51543.49 54046.21,51596.21 ; R14.2@54016.14,51538.19 54046.21,51596.21 ; S1.5@54074.89,51693.24 54100,51650 ; S1.5@54084.21,51697.44 54100,51650 ; S1.5@54094.01,51699.64 54100,51650 ; S1.5@54100,51700 54100,51650 ; S1.5@54105.99,51699.64 54100,51650 ; S1.5@54115.79,51697.44 54100,51650 ; S1.5@54125.11,51693.24 54100,51650 ; 53930,51550 R14.4@53900,51550 R14.2@54000,51550 54100,51650
  BottomLayer w10: S1.5@54100,51700 54300,51700 54350,51650 54450,51650 ; S1.5@54100.3,51694.01 54161,51700 ; S1.5@54100.3,51705.99 54161,51700 ; S1.5@54102.1,51684.14 54161,51700 ; S1.5@54102.1,51715.86 54161,51700 ; S1.5@54105.54,51674.6 54161,51700 ; S1.5@54105.54,51725.4 54161,51700 ; S2.5@54478.55,51714.69 54450,51650 ; S2.5@54487.48,51709.96 54450,51650 ; S2.5@54495.58,51704.06 54450,51650 ; S2.5@54500.3,51694.01 54561,51700 ; S2.5@54500.3,51705.99 54561,51700 ; S2.5@54502.1,51684.14 54561,51700 ; S2.5@54502.1,51715.86 54561,51700 ; S2.5@54504.06,51695.58 54450,51650 ; S2.5@54505.54,51674.6 54561,51700 ; S2.5@54505.54,51725.4 54561,51700 ; S2.5@54509.96,51687.48 54450,51650 ; S2.5@54514.69,51678.55 54450,51650 ; S3.5@54878.55,51714.69 54850,51650 ; S3.5@54887.48,51709.96 54850,51650 ; S3.5@54895.58,51704.06 54850,51650 ; S3.5@54900.3,51694.01 54961,51700 ; S3.5@54900.3,51705.99 54961,51700 ; S3.5@54902.1,51684.14 54961,51700 ; S3.5@54902.1,51715.86 54961,51700 ; S3.5@54904.06,51695.58 54850,51650 ; S3.5@54905.54,51674.6 54961,51700 ; S3.5@54905.54,51725.4 54961,51700 ; S3.5@54909.96,51687.48 54850,51650 ; S3.5@54914.69,51678.55 54850,51650 ; S4.5@55278.55,51714.69 55250,51650 ; S4.5@55287.48,51709.96 55250,51650 ; S4.5@55295.58,51704.06 55250,51650 ; S4.5@55304.06,51695.58 55250,51650 ; S4.5@55309.96,51687.48 55250,51650 ; S4.5@55314.69,51678.55 55250,51650 ; 54450,51650 S2.5@54500,51700 ; 54450,51650 S2.5@54500,51700 ; S2.5@54500,51700 54700,51700 54750,51650 54850,51650 ; 54850,51650 S3.5@54900,51700 ; 54850,51650 S3.5@54900,51700 ; S3.5@54900,51700 55100,51700 55150,51650 55250,51650 ; 55250,51650 S4.5@55300,51700 55250,51650
DIG0: U2.14
DIG1: U2.13
DIG2: U2.12
DIG3: U2.11
DIG4: D1.1 D1.3 R22.1 R22.3 U2.10 | length 3579.7
  TopLayer w10: v2@54005.29,51253.39 54025,51309 ; v2@54015.04,51250.85 54025,51309 ; v2(54025,51250) 54025,51425 54050,51450 ; v2@54034.96,51250.85 54025,51309 ; v2@54044.71,51253.39 54025,51309 ; D1.1@54075.55,51544.79 54100,51490 ; R22.1@54080.33,51453.64 54100,51505 ; D1.1@54085.12,51548.12 54100,51490 ; R22.1@54090.04,51450.91 54100,51505 ; R22.1@54096,51430.4 54050,51450 ; R22.1@54096,51469.6 54050,51450 ; R22.1@54099,51440.05 54050,51450 ; R22.1@54099,51459.95 54050,51450 ; R22.1@54100.91,51440.04 54155,51450 ; R22.1@54100.91,51459.96 54155,51450 ; R22.1@54103.64,51430.33 54155,51450 ; R22.1@54103.64,51469.67 54155,51450 ; R22.1@54109.96,51450.91 54100,51505 ; D1.1@54114.88,51548.12 54100,51490 ; R22.1@54119.67,51453.64 54100,51505 ; D1.1@54124.45,51544.79 54100,51490 ; D1.1@54128.45,51562.54 54101.33,51492.98 ; D1.3@54137.57,51558.25 54101.33,51492.98 ; D1.3@54149.53,51550 54101.33,51492.98 ; D1.3@54159.66,51539.59 54101.33,51492.98 ; D1.3@54165.4,51531.3 54101.33,51492.98 ; R22.3@54196.19,51429.77 54144.41,51450 ; R22.3@54196.19,51470.23 54144.41,51450 ; R22.3@54198.99,51439.46 54144.41,51450 ; R22.3@54198.99,51460.54 54144.41,51450 ; R22.3@54200,51450 R22.1@54100,51450 ; 54050,51450 R22.1@54100,51450 ; R22.1@54100,51450 D1.1@54100,51550 54100,51490
  BottomLayer w10: U2.10@53300,51200 53393.43,51200 53395.93,51202.5 53402.5,51202.5 53450,51250 v2(54025,51250) ; U2.10@53300.3,51194.01 53361,51200 ; U2.10@53300.3,51205.99 53361,51200 ; U2.10@53302.1,51184.14 53361,51200 ; U2.10@53302.1,51215.86 53361,51200 ; U2.10@53305.54,51174.6 53361,51200 ; U2.10@53305.54,51225.4 53361,51200 ; v2@54021.61,51230.29 53966,51250 ; v2@54021.61,51269.71 53966,51250 ; v2@54024.15,51240.04 53966,51250 ; v2@54024.15,51259.96 53966,51250
DIG5: D2.1 D2.3 R23.1 R23.3 U2.9 | length 3365.2
  TopLayer w10: D2.1@54475.55,51544.79 54500,51490 ; R23.1@54480.33,51453.64 54500,51505 ; D2.1@54485.12,51548.12 54500,51490 ; R23.1@54490.04,51450.91 54500,51505 ; D2.1@54500,51550 R23.1@54500,51450 R23.3@54600,51450 ; R23.1@54500.91,51440.04 54555,51450 ; R23.1@54500.91,51459.96 54555,51450 ; R23.1@54503.64,51430.33 54555,51450 ; R23.1@54503.64,51469.67 54555,51450 ; R23.1@54509.96,51450.91 54500,51505 ; D2.1@54514.88,51548.12 54500,51490 ; R23.1@54519.67,51453.64 54500,51505 ; D2.1@54524.45,51544.79 54500,51490 ; D2.1@54528.45,51562.54 54501.33,51492.98 ; D2.3@54537.57,51558.25 54501.33,51492.98 ; D2.3@54549.53,51550 54501.33,51492.98 ; D2.3@54559.66,51539.59 54501.33,51492.98 ; D2.3@54565.4,51531.3 54501.33,51492.98 ; R23.3@54596.19,51429.77 54544.41,51450 ; R23.3@54596.19,51470.23 54544.41,51450 ; R23.3@54598.99,51439.46 54544.41,51450 ; R23.3@54598.99,51460.54 54544.41,51450
  BottomLayer w10: U2.9@53300,51300 53400,51300 53450,51350 53775,51350 53825,51400 54450,51400 R23.1@54500,51450 ; U2.9@53300.3,51294.01 53361,51300 ; U2.9@53300.3,51305.99 53361,51300 ; U2.9@53302.1,51284.14 53361,51300 ; U2.9@53302.1,51315.86 53361,51300 ; U2.9@53305.54,51274.6 53361,51300 ; U2.9@53305.54,51325.4 53361,51300 ; R23.1@54483.86,51461.81 54453.79,51403.79 ; R23.1@54492.41,51456.51 54453.79,51403.79 ; R23.1@54506.51,51442.41 54453.79,51403.79 ; R23.1@54511.81,51433.86 54453.79,51403.79
DIG6: D3.1 D3.3 R24.1 R24.3 U2.8 | length 3765.2
  TopLayer w10: D3.1@54875.55,51544.79 54900,51490 ; R24.1@54880.33,51453.64 54900,51505 ; D3.1@54885.12,51548.12 54900,51490 ; R24.1@54890.04,51450.91 54900,51505 ; D3.1@54900,51550 R24.1@54900,51450 R24.3@55000,51450 ; R24.1@54900.91,51440.04 54955,51450 ; R24.1@54900.91,51459.96 54955,51450 ; R24.1@54903.64,51430.33 54955,51450 ; R24.1@54903.64,51469.67 54955,51450 ; R24.1@54909.96,51450.91 54900,51505 ; D3.1@54914.88,51548.12 54900,51490 ; R24.1@54919.67,51453.64 54900,51505 ; D3.1@54924.45,51544.79 54900,51490 ; D3.1@54928.45,51562.54 54901.33,51492.98 ; D3.3@54937.57,51558.25 54901.33,51492.98 ; D3.3@54949.53,51550 54901.33,51492.98 ; D3.3@54959.66,51539.59 54901.33,51492.98 ; D3.3@54965.4,51531.3 54901.33,51492.98 ; R24.3@54996.19,51429.77 54944.41,51450 ; R24.3@54996.19,51470.23 54944.41,51450 ; R24.3@54998.99,51439.46 54944.41,51450 ; R24.3@54998.99,51460.54 54944.41,51450
  BottomLayer w10: U2.8@53300,51400 53400,51400 53450,51450 53900,51450 53950,51500 54850,51500 R24.1@54900,51450 ; U2.8@53300.3,51394.01 53361,51400 ; U2.8@53300.3,51405.99 53361,51400 ; U2.8@53302.1,51384.14 53361,51400 ; U2.8@53302.1,51415.86 53361,51400 ; U2.8@53305.54,51374.6 53361,51400 ; U2.8@53305.54,51425.4 53361,51400 ; R24.1@54883.86,51438.19 54853.79,51496.21 ; R24.1@54892.41,51443.49 54853.79,51496.21 ; R24.1@54906.51,51457.59 54853.79,51496.21 ; R24.1@54911.81,51466.14 54853.79,51496.21
DIG7: D4.1 D4.3 R25.1 R25.3 U2.7 | length 4186.6
  TopLayer w10: D4.1@55275.55,51544.79 55300,51490 ; R25.1@55280.33,51453.64 55300,51505 ; D4.1@55285.12,51548.12 55300,51490 ; R25.1@55290.04,51450.91 55300,51505 ; D4.1@55300,51550 R25.1@55300,51450 R25.3@55400,51450 ; R25.1@55300.91,51440.04 55355,51450 ; R25.1@55300.91,51459.96 55355,51450 ; R25.1@55303.64,51430.33 55355,51450 ; R25.1@55303.64,51469.67 55355,51450 ; R25.1@55309.96,51450.91 55300,51505 ; D4.1@55314.88,51548.12 55300,51490 ; R25.1@55319.67,51453.64 55300,51505 ; D4.1@55324.45,51544.79 55300,51490 ; D4.1@55328.45,51562.54 55301.33,51492.98 ; D4.3@55337.57,51558.25 55301.33,51492.98 ; D4.3@55349.53,51550 55301.33,51492.98 ; D4.3@55359.66,51539.59 55301.33,51492.98 ; D4.3@55365.4,51531.3 55301.33,51492.98 ; R25.3@55396.19,51429.77 55344.41,51450 ; R25.3@55396.19,51470.23 55344.41,51450 ; R25.3@55398.99,51439.46 55344.41,51450 ; R25.3@55398.99,51460.54 55344.41,51450
  BottomLayer w10: U2.7@53300,51500 53400,51500 53450,51550 53625,51550 53675,51600 55250,51600 ; U2.7@53300.3,51494.01 53361,51500 ; U2.7@53300.3,51505.99 53361,51500 ; U2.7@53302.1,51484.14 53361,51500 ; U2.7@53302.1,51515.86 53361,51500 ; U2.7@53305.54,51474.6 53361,51500 ; U2.7@53305.54,51525.4 53361,51500 ; D4.1@55279.48,51535.73 55250,51600 ; D4.1@55288.33,51540.58 55250,51600 ; D4.1@55300,51550 55250,51600 ; D4.1@55309.42,51561.67 55250,51600 ; D4.1@55314.27,51570.52 55250,51600
DP: R18.2 R18.4 S1.6 S2.6 S3.6 S4.6 | length 4480.5
  TopLayer w10: R18.4@53900,51650 R18.2@54000,51650 53945,51650 ; R18.4@53901.01,51639.46 53955.59,51650 ; R18.4@53901.01,51660.54 53955.59,51650 ; R18.4@53903.81,51629.77 53955.59,51650 ; R18.4@53903.81,51670.23 53955.59,51650 ; R18.2@53996.36,51630.33 53945,51650 ; R18.2@53996.36,51669.67 53945,51650 ; R18.2@53999.09,51640.04 53945,51650 ; R18.2@53999.09,51659.96 53945,51650
  BottomLayer w10: R18.2@53988.19,51666.14 54046.21,51696.21 ; R18.2@53993.49,51657.59 54046.21,51696.21 ; R18.2@54000,51650 54050,51700 54050,51725 54075,51750 54300,51750 54350,51700 ; R18.2@54007.59,51643.49 54046.21,51696.21 ; R18.2@54016.14,51638.19 54046.21,51696.21 ; S1.6@54393.24,51674.89 54350,51700 ; S1.6@54393.24,51725.11 54350,51700 ; S1.6@54397.44,51684.21 54350,51700 ; S1.6@54397.44,51715.79 54350,51700 ; S1.6@54399.64,51694.01 54350,51700 ; S1.6@54399.64,51705.99 54350,51700 ; S2.6@54793.24,51674.89 54750,51700 ; S2.6@54793.24,51725.11 54750,51700 ; S2.6@54797.44,51684.21 54750,51700 ; S2.6@54797.44,51715.79 54750,51700 ; S2.6@54799.64,51694.01 54750,51700 ; S2.6@54799.64,51705.99 54750,51700 ; S4.6@55593.24,51674.89 55550,51700 ; S4.6@55593.24,51725.11 55550,51700 ; S4.6@55597.44,51684.21 55550,51700 ; S4.6@55597.44,51715.79 55550,51700 ; S4.6@55599.64,51694.01 55550,51700 ; S4.6@55599.64,51705.99 55550,51700 ; S4.6@55600,51700 55550,51700 ; 54350,51700 S1.6@54400,51700 ; 54350,51700 S1.6@54400,51700 ; S1.6@54400,51700 54425,51700 54475,51750 54700,51750 54750,51700 ; 54750,51700 S2.6@54800,51700 ; 54750,51700 S2.6@54800,51700 ; S2.6@54800,51700 54825,51700 54875,51750 55100,51750 ; 55100,51750 55150,51700 ; 55100,51750 55150,51700 ; 55150,51700 S3.6@55200,51700 ; 55150,51700 55199.64,51705.99 55150,51700 ; 55150,51700 55199.64,51694.01 55150,51700 ; 55150,51700 55197.44,51715.79 55150,51700 ; 55150,51700 55197.44,51684.21 55150,51700 ; 55150,51700 55193.24,51725.11 55150,51700 ; 55150,51700 55193.24,51674.89 55150,51700 ; 55150,51700 S3.6@55200,51700 ; 55150,51700 S3.6@55200,51700 ; 55150,51700 S3.6@55200,51700 ; S3.6@55200,51700 55225,51700 55275,51750 55500,51750 55550,51700
E: R15.2 R15.4 S1.4 S2.4 S3.4 S4.4 | length 3282.1
  TopLayer w10: R15.4@53900,51725 R15.2@54000,51725 ; R15.4@53901.01,51714.46 53955.59,51725 ; R15.4@53901.01,51735.54 53955.59,51725 ; R15.4@53903.81,51704.77 53955.59,51725 ; R15.4@53903.81,51745.23 53955.59,51725 ; R15.2@53996.36,51705.33 53945,51725 ; R15.2@53996.36,51744.67 53945,51725 ; R15.2@53999.09,51715.04 53945,51725 ; R15.2@53999.09,51734.96 53945,51725
  BottomLayer w10: R15.2@53988.19,51741.14 54046.21,51771.21 ; R15.2@53993.49,51732.59 54046.21,51771.21 ; R15.2@54000,51725 54075,51800 S1.4@54100,51800 54300,51800 54350,51750 54425,51750 S2.4@54475,51800 ; R15.2@54007.59,51718.49 54046.21,51771.21 ; R15.2@54016.14,51713.19 54046.21,51771.21 ; S1.4@54100.3,51794.01 54161,51800 ; S1.4@54100.3,51805.99 54161,51800 ; S1.4@54102.1,51784.14 54161,51800 ; S1.4@54102.1,51815.86 54161,51800 ; S1.4@54105.54,51774.6 54161,51800 ; S1.4@54105.54,51825.4 54161,51800 ; S2.4@54500,51800 54700,51800 54750,51750 54825,51750 S3.4@54875,51800 ; S2.4@54500.3,51794.01 54561,51800 ; S2.4@54500.3,51805.99 54561,51800 ; S2.4@54502.1,51784.14 54561,51800 ; S2.4@54502.1,51815.86 54561,51800 ; S2.4@54505.54,51774.6 54561,51800 ; S2.4@54505.54,51825.4 54561,51800 ; S3.4@54900,51800 55100,51800 55150,51750 55225,51750 S4.4@55275,51800 ; S3.4@54900.3,51794.01 54961,51800 ; S3.4@54900.3,51805.99 54961,51800 ; S3.4@54902.1,51784.14 54961,51800 ; S3.4@54902.1,51815.86 54961,51800 ; S3.4@54905.54,51774.6 54961,51800 ; S3.4@54905.54,51825.4 54961,51800
F: R16.2 R16.4 S1.2 S2.2 S3.2 S4.2 | length 3671.8
  TopLayer w10: R16.4@53900,51950 R16.2@54000,51950 ; R16.4@53901.01,51939.46 53955.59,51950 ; R16.4@53901.01,51960.54 53955.59,51950 ; R16.4@53903.81,51929.77 53955.59,51950 ; R16.4@53903.81,51970.23 53955.59,51950 ; R16.2@53996.36,51930.33 53945,51950 ; R16.2@53996.36,51969.67 53945,51950 ; R16.2@53999.09,51940.04 53945,51950 ; R16.2@53999.09,51959.96 53945,51950
  BottomLayer w10: R16.2@53988.19,51966.14 54046.21,51996.21 ; R16.2@53993.49,51957.59 54046.21,51996.21 ; R16.2@54000,51950 54050,52000 ; R16.2@54007.59,51943.49 54046.21,51996.21 ; R16.2@54016.14,51938.19 54046.21,51996.21 ; S1.2@54075,52000 S1.2@54100,52000 ; S1.2@54093.24,51974.89 54050,52000 ; S1.2@54093.24,52025.11 54050,52000 ; S1.2@54097.44,51984.21 54050,52000 ; S1.2@54097.44,52015.79 54050,52000 ; S1.2@54099.64,51994.01 54050,52000 ; S1.2@54099.64,52005.99 54050,52000 ; S1.2@54100.3,51994.01 54161,52000 ; S1.2@54100.3,52005.99 54161,52000 ; S1.2@54102.1,51984.14 54161,52000 ; S1.2@54102.1,52015.86 54161,52000 ; S1.2@54105.54,51974.6 54161,52000 ; S1.2@54105.54,52025.4 54161,52000 ; S2.2@54500.3,51994.01 54561,52000 ; S2.2@54500.3,52005.99 54561,52000 ; S2.2@54502.1,51984.14 54561,52000 ; S2.2@54502.1,52015.86 54561,52000 ; S2.2@54505.54,51974.6 54561,52000 ; S2.2@54505.54,52025.4 54561,52000 ; S3.2@54900.3,51994.01 54961,52000 ; S3.2@54900.3,52005.99 54961,52000 ; S3.2@54902.1,51984.14 54961,52000 ; S3.2@54902.1,52015.86 54961,52000 ; S3.2@54905.54,51974.6 54961,52000 ; S3.2@54905.54,52025.4 54961,52000 ; S4.2@55300,52000 55275,52000 55225,52050 55150,52050 55100,52000 S3.2@54900,52000 54875,52000 54825,52050 54750,52050 54700,52000 S2.2@54500,52000 54475,52000 54425,52050 54350,52050 54300,52000 S1.2@54100,52000 ; 54050,52000 S1.2@54100,52000
G: R17.2 R17.4 S1.1 S2.1 S3.1 S4.1 | length 5145.6
  TopLayer w10: R17.4@53900,52100 R17.2@54000,52100 ; R17.4@53901.01,52089.46 53955.59,52100 ; R17.4@53901.01,52110.54 53955.59,52100 ; R17.4@53903.81,52079.77 53955.59,52100 ; R17.4@53903.81,52120.23 53955.59,52100 ; R17.2@53996.36,52080.33 53945,52100 ; R17.2@53996.36,52119.67 53945,52100 ; R17.2@53999.09,52090.04 53945,52100 ; R17.2@53999.09,52109.96 53945,52100
  BottomLayer w10: R17.2@54000,52100 S1.1@54100,52100 ; R17.2@54000.91,52090.04 54055,52100 ; R17.2@54000.91,52109.96 54055,52100 ; R17.2@54003.64,52080.33 54055,52100 ; R17.2@54003.64,52119.67 54055,52100 ; S1.1@54092,52100 S1.1@54100,52100 ; S1.1@54094.46,52074.6 54039,52100 ; S1.1@54094.46,52125.4 54039,52100 ; S1.1@54097.9,52084.14 54039,52100 ; S1.1@54097.9,52115.86 54039,52100 ; S1.1@54099.7,52094.01 54039,52100 ; S1.1@54099.7,52105.99 54039,52100 ; S1.1@54100.3,52094.01 54161,52100 ; S1.1@54100.3,52105.99 54161,52100 ; S1.1@54102.1,52084.14 54161,52100 ; S1.1@54102.1,52115.86 54161,52100 ; S1.1@54105.54,52074.6 54161,52100 ; S1.1@54105.54,52125.4 54161,52100 ; S2.1@54479.8,52083.63 54446.02,52145.98 ; S2.1@54488.32,52089.07 54446.02,52145.98 ; S2.1@54495.92,52095.6 54446.02,52145.98 ; S2.1@54500.3,52094.01 54561,52100 ; S2.1@54500.3,52105.99 54561,52100 ; S2.1@54502.1,52084.14 54561,52100 ; S2.1@54502.1,52115.86 54561,52100 ; S2.1@54503.69,52104.73 54446.02,52145.98 ; S2.1@54505.54,52074.6 54561,52100 ; S2.1@54505.54,52125.4 54561,52100 ; S2.1@54508.93,52113.27 54446.02,52145.98 ; S2.1@54512.94,52122.55 54446.02,52145.98 ; S3.1@54879.8,52083.63 54846.02,52145.98 ; S3.1@54888.32,52089.07 54846.02,52145.98 ; S3.1@54895.92,52095.6 54846.02,52145.98 ; S3.1@54900.3,52094.01 54961,52100 ; S3.1@54900.3,52105.99 54961,52100 ; S3.1@54902.1,52084.14 54961,52100 ; S3.1@54902.1,52115.86 54961,52100 ; S3.1@54903.69,52104.73 54846.02,52145.98 ; S3.1@54905.54,52074.6 54961,52100 ; S3.1@54905.54,52125.4 54961,52100 ; S3.1@54908.93,52113.27 54846.02,52145.98 ; S3.1@54912.94,52122.55 54846.02,52145.98 ; S4.1@55279.8,52083.63 55246.02,52145.98 ; S4.1@55288.32,52089.07 55246.02,52145.98 ; S4.1@55295.92,52095.6 55246.02,52145.98 ; S4.1@55303.69,52104.73 55246.02,52145.98 ; S4.1@55308.93,52113.27 55246.02,52145.98 ; S4.1@55312.94,52122.55 55246.02,52145.98 ; S1.1@54100,52100 54300,52100 54346,52146 54446,52146 ; 54446.02,52145.98 S2.1@54500,52100 ; 54446,52146 54492,52100 S2.1@54500,52100 ; S2.1@54500,52100 54700,52100 54746,52146 54750,52146 54846,52146 ; 54846.02,52145.98 S3.1@54900,52100 ; 54846,52146 S3.1@54892,52100 ; S3.1@54892,52100 S3.1@54900,52100 ; S3.1@54892,52100 S3.1@54900,52100 ; S3.1@54900,52100 55100,52100 55146,52146 55150,52146 55246,52146 ; 55246.02,52145.98 S4.1@55300,52100 55292,52100 55246,52146